# Altium PCB PCB1.PcbDoc
Units mm, origin at the board's own origin, x right, y up, seen from the top; angles counter-clockwise.
Board outline 63.37 x 59.94 mm, 2 copper layers (Top Layer, Bottom Layer); 46 components, 53 nets, 194 pads, 30 vias.
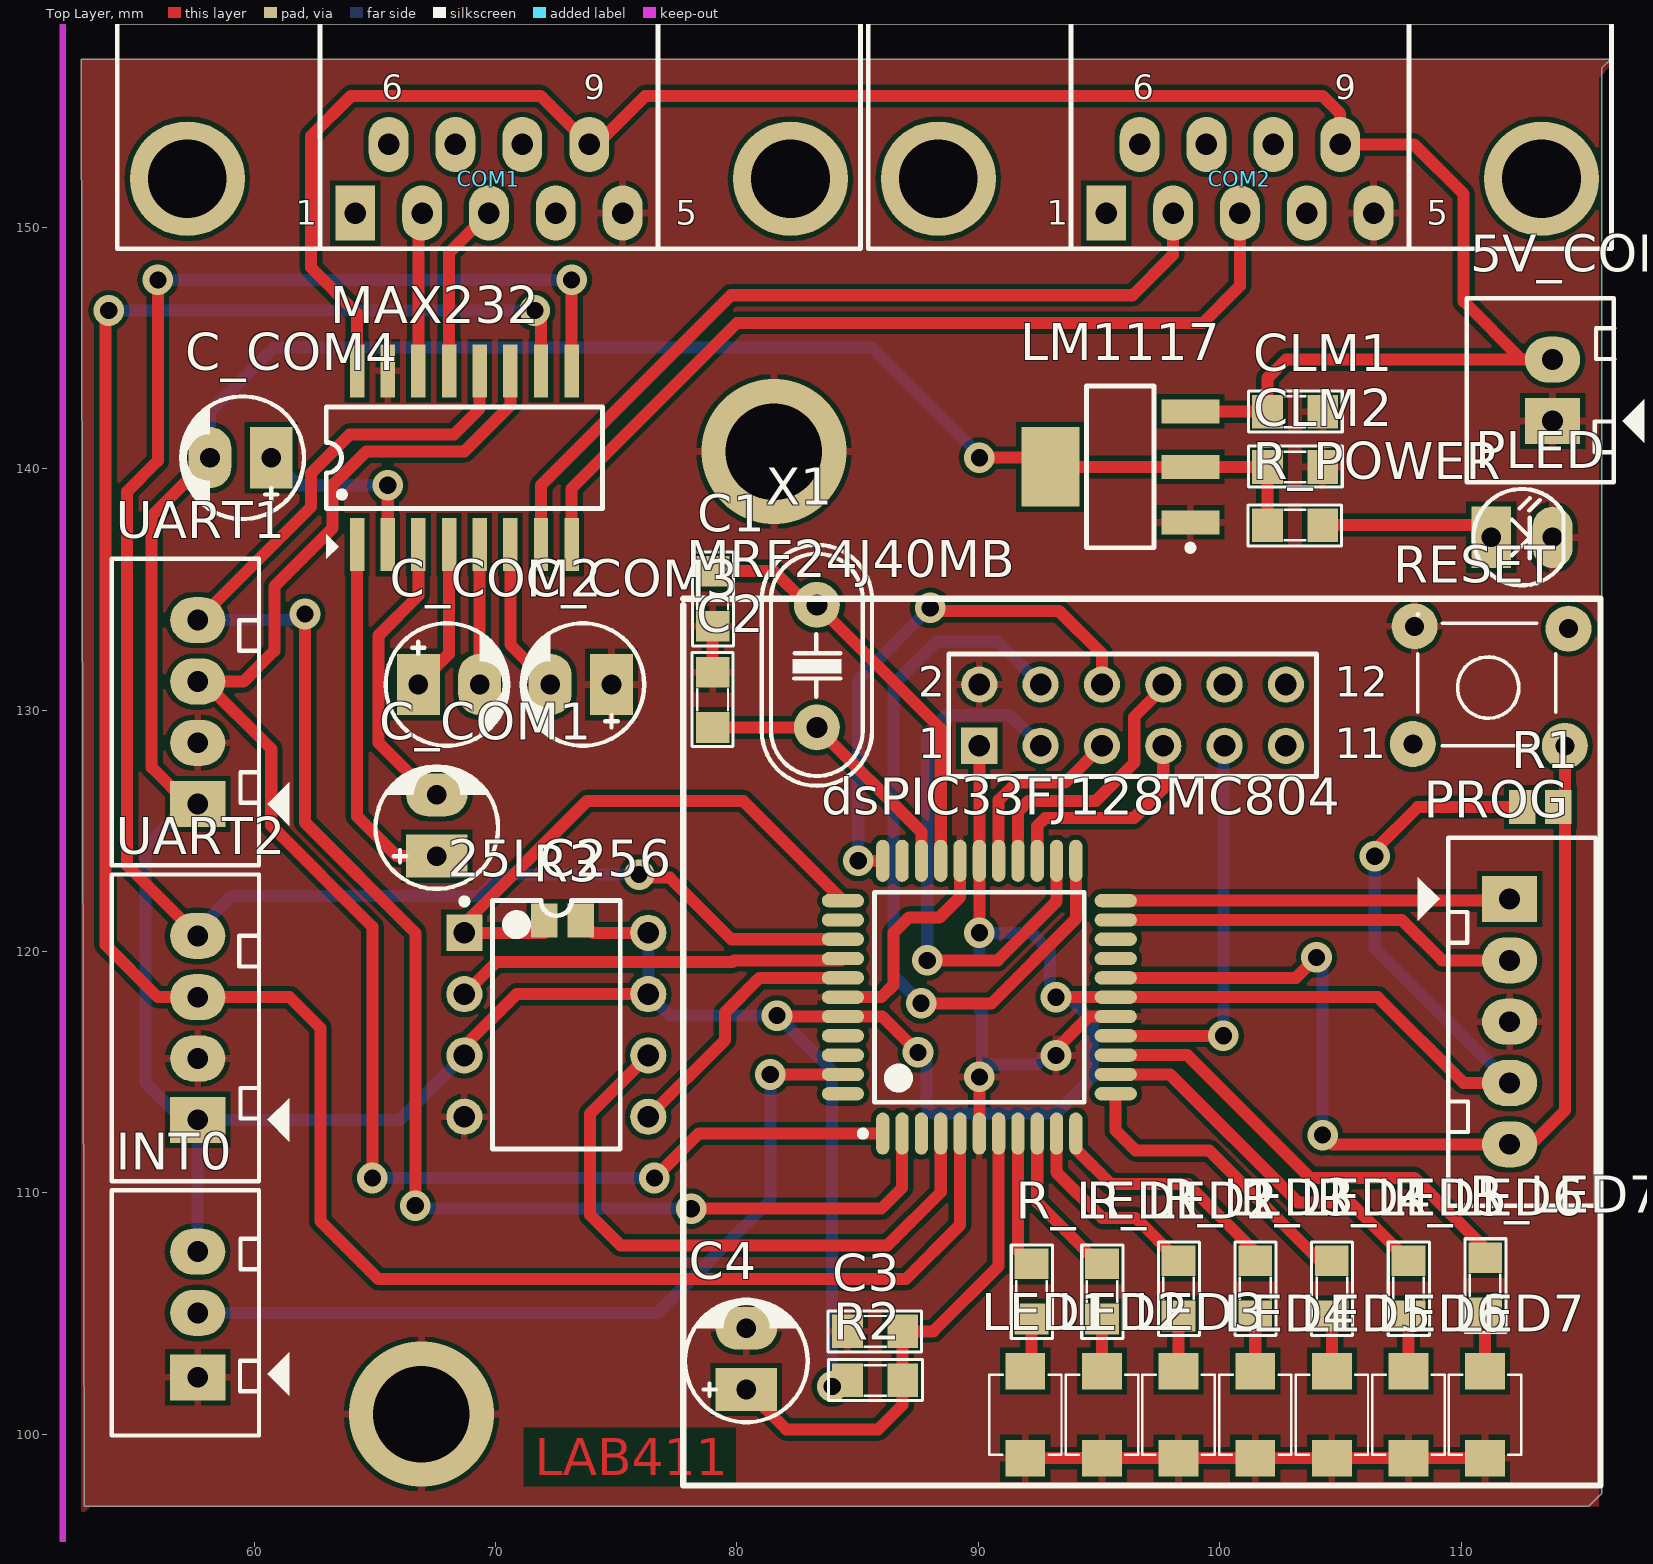
[diagram p0: Top Layer view]
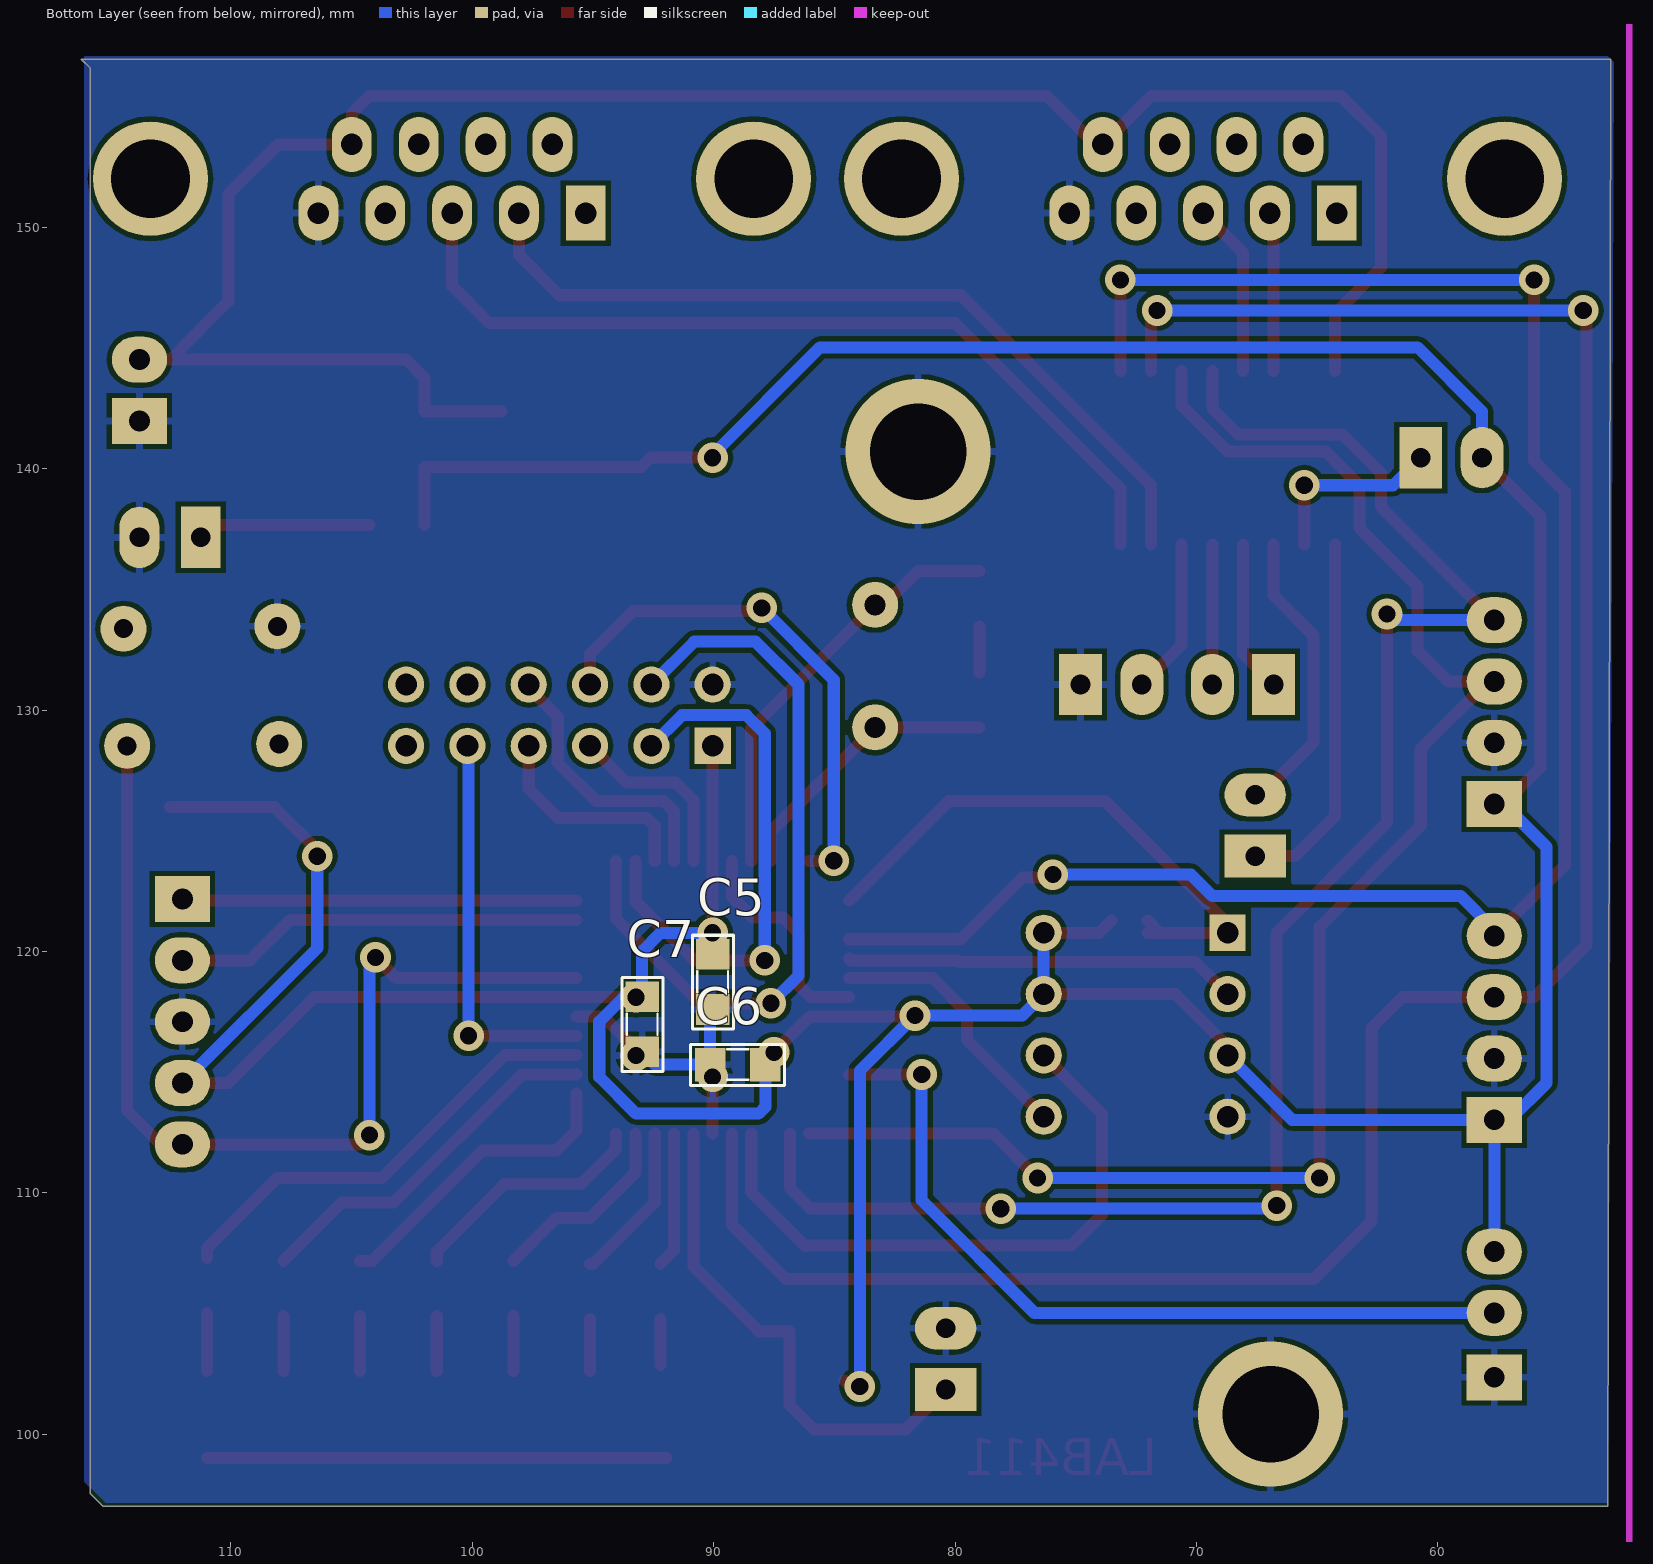
[diagram p1: Bottom Layer view, seen from below]
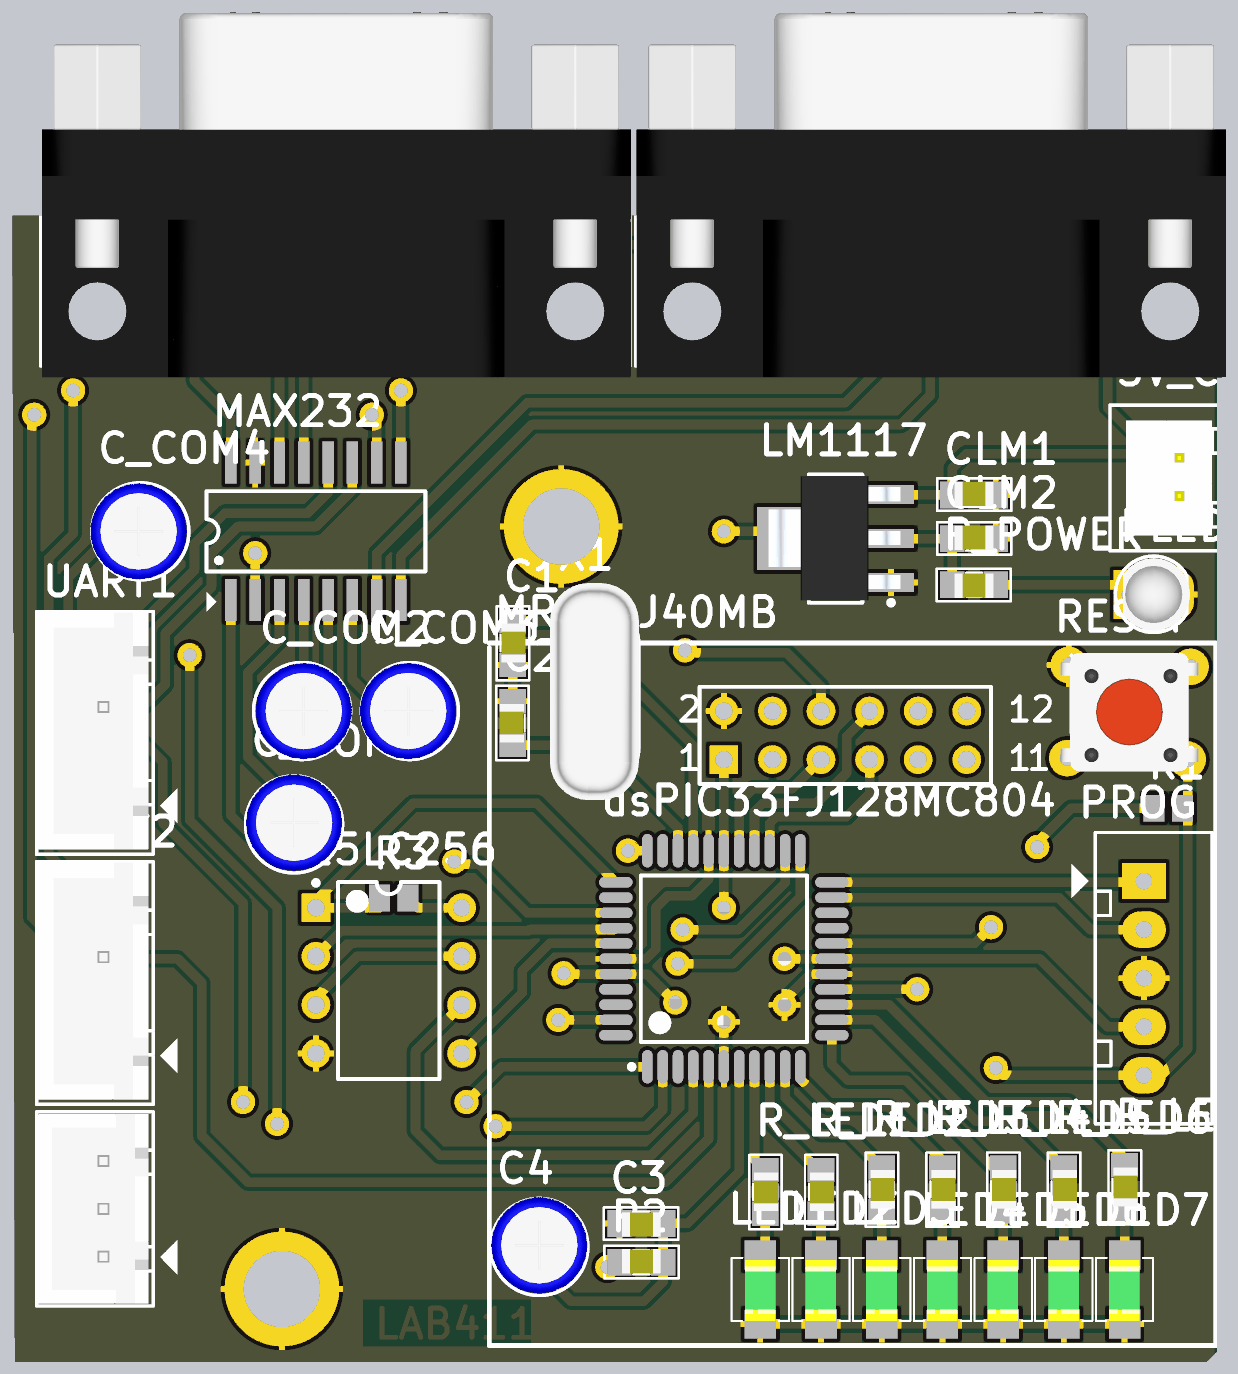
[diagram p2: 3D render of the assembled board from above, using the file's embedded part models]
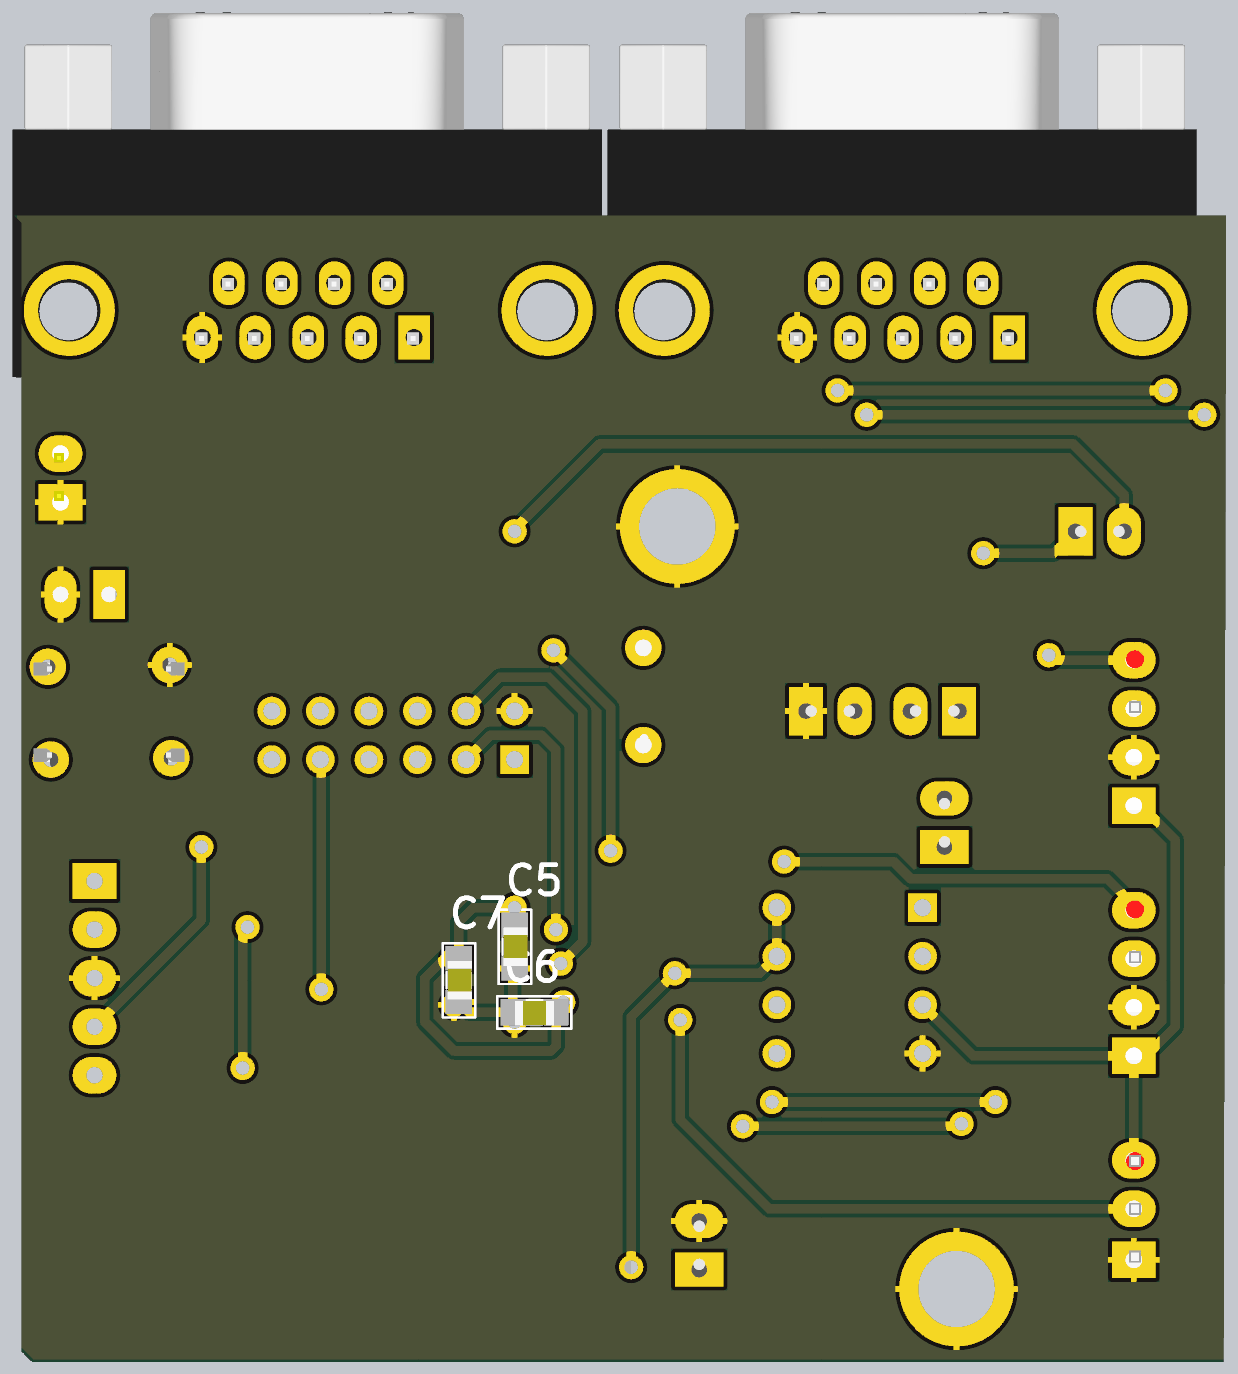
[diagram p3: 3D render of the assembled board from below, using the file's embedded part models]

## Layer stack, top to bottom
Top Layer: signal copper 0.0356
Dielectric: core 0.32, FR-4, Dk 4.8
Bottom Layer: signal copper 0.0356

## Board outline
52.832,156.972 116.205,156.972 115.824,156.591 115.824,97.536 115.316,97.028 52.959,97.028

## Design rules (kind name [scope] priority, off if disabled: settings)
Clearance [All] p1: gap=0.203
PlaneConnect [All] p1: planeconnectstyle=Relief reliefexpansion=0.508 reliefentries=4 reliefconductorwidth=0.5 reliefairgap=0.8
PolygonConnect [All] p1: connectstyle=Relief reliefconductorwidth=0.3 reliefentries=4 polygonreliefangle="90 Angle"
RoomDefinition Sheet1 [InComponentClass('Sheet1')] p1: confinementstyle=ConfineIn formatcopy=TRUE lockcomponents=FALSE outline 178.943,77.724 621.411,77.724 621.411,118.872 178.943,118.872
RoutingVias [All] p1: holewidth=0.635 width=1.016 viastyle="Through Hole" minholewidth=0.711 minwidth=1.27 maxholewidth=0.711 maxwidth=1.27
SilkscreenOverComponentPads [All] p1: minsilkscreentomaskgap=0.254
SolderMaskExpansion [All] p1: expansion=0.202
Width [All] p1: maxlimit=2 minlimit=0.203 preferedwidth=0.5
26 further rules are at their usual default settings.

## Components (designator, comment, footprint, x,y, rotation, side; value= is the part's Value field where it differs from the comment)
5V_CON "JP2" CON2 113.792,141.986 r90 top
25LC256 "25LC256" DIP-8 72.517,116.967 r0 top
C1 "103" SM-0805 78.994,134.62 r90 top
C2 "103" SM-0805 78.994,130.429 r270 top
C3 "104" SM-0805 85.725,104.267 r0 top
C4 "10uF" CP1/2 80.391,101.854 r90 top
C5 "104" SM-0805 90.043,118.745 r90 bottom
C6 "104" SM-0805 89.002,115.316 r180 bottom
C7 "104" SM-0805 92.964,116.992 r90 bottom
C_COM1 "1uF" CP1/2 67.564,123.952 r90 top
C_COM2 "1uF" CP1/2 66.802,131.064 r0 top
C_COM3 "1uF" CP1/2 74.803,131.064 r180 top
C_COM4 "1uF" CP1/2 60.706,140.462 r180 top
CLM1 "104" SM-0805 103.124,142.367 r180 top
CLM2 "104" SM-0805 103.124,140.081 r180 top
COM1 "COM 9 FMALE" "DSB 9-F" 69.723,152.019 r0 top
COM2 "COM 9 FMALE" "DSB 9-F" 100.838,152.019 r0 top
dsPIC33FJ128MC804 "DSPIC33FJ128MC804T-E/PT" TQFP-PT44_N 90.043,118.11 r90 top
INT0 "JP3" CON3 57.658,102.489 r90 top
LED1 "LED" SM-LED-Red 91.948,102.616 r270 top
LED2 "LED" SM-LED-Red 95.123,102.616 r270 top
LED3 "LED" SM-LED-Red 98.298,102.616 r270 top
LED4 "LED" SM-LED-Red 101.473,102.616 r270 top
LED5 "LED" SM-LED-Red 104.648,102.616 r270 top
LED6 "LED" SM-LED-Red 107.823,102.616 r270 top
LED7 "LED" SM-LED-Red 110.998,102.616 r270 top
LM1117 "LM1117" SOT223-4N 95.885,140.081 r180 top
MAX232 "MAX232" SOP16 68.707,140.462 r0 top
MRF24J40MB "Header 6X2" MRF24J40MB_board_mini 88.773,132.334 r270 top
PLED "LED" LED-3 111.252,137.16 r0 top
PROG "JP5" CON5 112.014,122.174 r270 top
R1 "10k" C0805 113.284,125.984 r0 top
R2 "1k" SM-0805 85.725,102.235 r180 top
R3 "Res Semi" C0805 72.771,121.285 r0 top
R_LED1 "1k" SM-0805 92.202,105.918 r90 top
R_LED2 "1k" SM-0805 95.123,105.918 r90 top
R_LED3 "1k" SM-0805 98.298,106.045 r90 top
R_LED4 "1k" SM-0805 101.473,106.045 r90 top
R_LED5 "1k" SM-0805 104.648,106.045 r90 top
R_LED6 "1k" SM-0805 107.823,106.045 r90 top
R_LED7 "1k" SM-0805 110.998,106.172 r90 top
R_POWER "1k" SM-0805 103.124,137.668 r0 top
RESET "SW" SW4 114.3,128.524 r180 top
UART1 "JP4" CON4 57.658,126.111 r90 top
UART2 "JP4" CON4 57.658,113.03 r90 top
X1 "4Mhz" XT2 83.312,131.826 r270 top

## Footprints (in the part's own frame and the unit in brackets; to place one, negate y for a bottom-side part, rotate by r counter-clockwise, add the part's x,y. Pads: shape width x height; smd on the part's side, far side on the other; paste and mask are expansions set on the pad)
C0805 [mm] "Chip Capacitor, Body 2.0x1.3mm, IPC High Density"
  rect 1.1x1.4 smd: 1(-0.75,0) 2(0.75,0)
  body extent -1.1,-0.72 1.1,0.72, height 1.4
CON2 [mil] "CON2"
  rect 75x90 hole 34: 1(0,0)
  oval 75x90 hole 34: 2(100,0)
  silkscreen extent -100,-150 200,140, body extent -68,-70 168,107, height 236
CON3 [mil] "CON 3"
  rect 75x90 hole 34: 1(-5,0)
  oval 75x90 hole 34: 2(100,0) 3(200,0)
  silkscreen extent -100,-150 300,140, body extent -95,-90 295,136, height 276
CON4 [mil] "CON4"
  rect 75x90 hole 34: 1(0,0)
  oval 75x90 hole 34: 2(100,0) 3(200,0) 4(300,0)
  silkscreen extent -100,-150 400,140, body extent -90,-90 398,136, height 276
CON5 [mil] "CON5"
  rect 75x90 hole 34: 1(0,0)
  oval 75x90 hole 34: 2(100,0) 3(200,0) 4(300,0) 5(400,0)
  silkscreen extent -100,-150 500,140
CP1/2 [mil] "Tu hoa < 22uF/16>50V"
  rect 70x100 hole 32: 1(0,0)
  oval 70x100 hole 32: 2(100,0)
  silkscreen extent -53,-100 146,100, body extent -49,-99 149,99, height 287
DIP-8 [mm] "DIP; 8 Leads; Row Spacing 7.62 mm; Pitch 2.54 mm"
  rect 1.5x1.5 hole 0.9: 1(-3.81,3.81)
  round 1.5 hole 0.9: 2(-3.81,1.27) 3(-3.81,-1.27) 4(-3.81,-3.81) 5(3.81,-3.81) 6(3.81,-1.27) 7(3.81,1.27) 8(3.81,3.81)
  silkscreen extent -3.93,-5.15 2.65,5.23, body extent -3.6,-5.15 3.6,5.15, height 5.08
"DSB 9-F" [mil] "COM FMALE - D Subminiature; 9 Position; Right Angle; Pitch 1.385 mm"
  rect 65x90 hole 35: 1(-218.11,-55.91)
  oval 65x90 hole 35: 2(-109.05,-55.91) 3(0,-55.91) 4(109.05,-55.91) 5(218.11,-55.91) 6(-163.58,55.91) 7(-54.53,55.91) 8(54.53,55.91) 9(163.58,55.91)
  round 187.4 hole 128.35: 10(-491.93,0) 11(491.93,0)
  silkscreen extent -606,-114 606,610, body extent -604,-138 608,613, height 495
LED-3 [mil] "LED 2 PIN, 3ly Only colour"
  rect 65x100 hole 32: 1(0,0)
  oval 65x100 hole 32: 2(100,0)
  silkscreen extent -29,-78 118,79, body extent -13,-75 125,75, height 217
MRF24J40MB_board_mini [mm]
  rect 1.5x1.5 hole 0.9: 1(3.81,1.27)
  round 1.5 hole 0.9: 2(1.27,1.27) 3(3.81,3.81) 4(1.27,3.81) 5(3.81,6.35) 6(1.27,6.35) 7(3.81,8.89) 8(1.27,8.89) 9(3.81,11.43) 10(1.27,11.43) 11(3.81,13.97) 12(1.27,13.97)
  silkscreen extent -2.29,-11 34.45,27, body extent 0,0 5.08,15.24, height 7
SM-0805 [mil] "Compoment SMD 80x50mil"
  rect 50x55 smd: 1(-45,0) 2(45,0)
  silkscreen extent -77,-34 76,33, body extent -40,-27 40,23, height 24
SM-LED-Red [mil]
  rect 60x65 smd: 1(0,0) 2(142,0)
  silkscreen extent 6,-59 136,59, body extent 10,-32 136,31, height 44
SOP16 [mm] "Small Outline; 16 Leads; Body Width 5.6 mm; Pitch 1.27 mm"
  rect 0.6x2.2 smd: 1(-4.445,-3.6) 2(-3.175,-3.6) 3(-1.905,-3.6) 4(-0.635,-3.6) 5(0.635,-3.6) 6(1.905,-3.6) 7(3.175,-3.6) 8(4.445,-3.6) 9(4.445,3.6) 10(3.175,3.6) 11(1.905,3.6) 12(0.635,3.6) 13(-0.635,3.6) 14(-1.905,3.6) 15(-3.175,3.6) 16(-4.445,3.6)
  silkscreen extent -5.73,-4.19 5.73,2.1
SOT223-4N [mm] "SOT223, 4-Leads, Body 6.5x3.5mm, Pitch 2.3mm, Lead Span 7mm, IPC Medium Density"
  rect 2.4x1 smd: 1(-2.9,2.3) 2(-2.9,0) 3(-2.9,-2.3)
  rect 2.4x3.3 smd: 4(2.9,0)
  silkscreen extent -3.03,-3.35 1.4,3.47, body extent -3.39,-3.27 3.5,3.23, height 1.72
SW4 [mil] "SW button 4pin, 250 x250 mil"
  round 75 hole 31: 1(0,0) 2(245,-195) 3(248,-3) 4(-6,-191)
  silkscreen extent 15,-215 240,0, body extent -36,-220 276,24, height 276
TQFP-PT44_N [mm] "Thin QFP, 44-Leads, Body 10x10mm, Pitch 0.8mm, IPC Medium Density"
  oval 1.75x0.55 smd: 1(-5.65,4) 2(-5.65,3.2) 3(-5.65,2.4) 4(-5.65,1.6) 5(-5.65,0.8) 6(-5.65,0) 7(-5.65,-0.8) 8(-5.65,-1.6) 9(-5.65,-2.4) 10(-5.65,-3.2) 11(-5.65,-4) 23(5.65,-4) 24(5.65,-3.2) 25(5.65,-2.4) 26(5.65,-1.6) 27(5.65,-0.8) 28(5.65,0) 29(5.65,0.8) 30(5.65,1.6) 31(5.65,2.4) 32(5.65,3.2) 33(5.65,4)
  oval 0.55x1.75 smd: 12(-4,-5.65) 13(-3.2,-5.65) 14(-2.4,-5.65) 15(-1.6,-5.65) 16(-0.8,-5.65) 17(0,-5.65) 18(0.8,-5.65) 19(1.6,-5.65) 20(2.4,-5.65) 21(3.2,-5.65) 22(4,-5.65) 34(4,5.65) 35(3.2,5.65) 36(2.4,5.65) 37(1.6,5.65) 38(0.8,5.65) 39(0,5.65) 40(-0.8,5.65) 41(-1.6,5.65) 42(-2.4,5.65) 43(-3.2,5.65) 44(-4,5.65)
  silkscreen extent -5.77,-4.35 4.35,4.95, body extent -5,-5 5,5, height 1.2
XT2 [mil] "Footpin for Crystal 2 pin"
  round 75 hole 34: 1(-100,0) 2(100,0)
  silkscreen extent -198,-90 195,90, body extent -233,-93 213,90, height 138

## Part data
5V_CON: library part Con2, "Connector 2"
C1 C2 C3 C5 C6 C7: library part CM, "Cap SMD"
C4 C_COM1 C_COM2 C_COM3 C_COM4: library part CP1, "Cap P  0,1uF < 22uF , 16 - 50V"
CLM1 CLM2: library part CN2, "Cap np 104 => 105pF"
COM1 COM2: library part DSB9F, "COM 9"
dsPIC33FJ128MC804: "High-Performance 16-bit Digital Signal Controller, 128 KB Flash, 16 KB RAM, 44-Pin TQFP, Extended High Temperature, Tape and Reel"
INT0: library part Con3, "Connector 3"
LED1 LED2 LED3 LED4 LED5 LED6 LED7 PLED: "LED Single colour Green and Red"
LM1117: "3v3"
MAX232: "Dual EIA-232 Driver/Receiver"
MRF24J40MB: "Header, 6-Pin, Dual row"
PROG: library part Con5, "Connector 5"
R1 R2 R_LED1 R_LED2 R_LED3 R_LED4 R_LED5 R_LED6 R_LED7 R_POWER: library part R, "Resistor 1/4W"
R3: "Semiconductor Resistor"
RESET: library part SW4, "Switch button 4 pin"
UART1 UART2: library part Con4, "Connector 4"
X1: library part XT2, "Crystal For all Crystal 2pin."

## Via types
v1: diameter 1.27, hole 0.711, Top Layer to Bottom Layer, 28 vias
v2: diameter 6, hole 4, Top Layer to Bottom Layer, 2 vias

## Nets (pads, with @x,y where several pads share a name; then routed paths per layer and width w, separated by ;. In a path a pad name is that pad's centre, name@x,y a point inside that pad or via, vN(x,y) a via of type N, cw(c..) or ccw(c..) an arc to the next point about the centre after c; other vN are vias at no path point)
5V: 5V_CON.2 CLM1.2 COM1.9 COM2.9 LM1117.3 MAX232.16 | length 87.6
  Top Layer w0.5: MAX232.16 64.262,146.431 62.357,148.336 62.357,153.797 64.008,155.448 71.869,155.448 COM1.9 74.191,153.439 76.2,155.448 104.267,155.448 104.993,154.722 COM2.9 108.054,153.439 110.109,151.384 110.109,146.939 112.522,144.526 ; LM1117.3 98.799,142.367 CLM1.2 101.981,143.764 102.743,144.526 112.522,144.526 ; 5V_CON.2 112.522,144.526
AN0: dsPIC33FJ128MC804.19
AN1: dsPIC33FJ128MC804.20
CS1: dsPIC33FJ128MC804.33 MRF24J40MB.6 | length 21.9
  Top Layer w0.5: v1(85.025,123.76) dsPIC33FJ128MC804.33 ; v1(88.011,134.239) 88.138,134.112 93.345,134.112 95.123,132.334 MRF24J40MB.6
  Bottom Layer w0.5: v1(85.025,123.76) 85.025,131.253 v1(88.011,134.239)
CS2: 25LC256.1 dsPIC33FJ128MC804.34 R3.1 | length 26.7
  Top Layer w0.5: R3.1@72.021,120.777 R3.1@71.513,120.777 ; R3.1 R3.1@71.513,120.777 ; dsPIC33FJ128MC804.34 80.265,126.238 73.787,126.238 68.707,121.158 25LC256.1 ; 25LC256.1 R3.1@71.513,120.777 ; 25LC256.1 R3.1@71.513,120.777
GND: 5V_CON.1 25LC256.4 C1.1 C2.1 C3.1 C4.2 C5.1 C6.1 C7.1 C_COM3.1 CLM1.1 CLM2.1 COM1.5 COM2.5 dsPIC33FJ128MC804.6 dsPIC33FJ128MC804.16 dsPIC33FJ128MC804.29 dsPIC33FJ128MC804.39 INT0.1 LED1.2 LED2.2 LED3.2 LED4.2 LED5.2 LED6.2 LED7.2 LM1117.1 MAX232.15 MRF24J40MB.2 PLED.2 PROG.3 RESET.2 UART1.2 UART2.2 | length 41.3
  Top Layer w0.5: C2.1 C1.1 ; dsPIC33FJ128MC804.39 85.979,118.11 86.487,118.618 86.487,120.777 87.122,121.412 88.392,121.412 89.243,122.263 dsPIC33FJ128MC804.29 ; dsPIC33FJ128MC804.6 v1(90.043,114.808) ; LED1.2 LED2.2 LED3.2 LED4.2 LED5.2 LED6.2 LED7.2 ; v1(93.218,115.697) 93.218,115.951 94.577,117.31 dsPIC33FJ128MC804.16
  Bottom Layer w0.5: C5.1 90.145,117.5 C6.1 92.431,115.316 C7.1
  other v2: 66.929,100.838 81.534,140.716
INT0: dsPIC33FJ128MC804.43 INT0.2 | length 33.9
  Top Layer w0.5: v1(81.382,114.91) dsPIC33FJ128MC804.43
  Bottom Layer w0.5: INT0.2 76.708,105.029 81.382,109.703 v1(81.382,114.91)
INT1: dsPIC33FJ128MC804.27 MRF24J40MB.5 | length 7.7
  Top Layer w0.5: dsPIC33FJ128MC804.27 90.843,126.276 91.567,127 93.599,127 MRF24J40MB.5
LED1: dsPIC33FJ128MC804.8 R_LED1.2 | length 5.6
  Top Layer w0.5: dsPIC33FJ128MC804.8 91.643,107.62 R_LED1.2
LED2: dsPIC33FJ128MC804.9 R_LED2.2 | length 6.6
  Top Layer w0.5: dsPIC33FJ128MC804.9 92.443,109.614 94.996,107.061 R_LED2.2
LED3: dsPIC33FJ128MC804.10 R_LED3.2 | length 8.2
  Top Layer w0.5: dsPIC33FJ128MC804.10 93.243,110.846 95.123,108.966 96.52,108.966 R_LED3.2
LED4: dsPIC33FJ128MC804.11 R_LED4.2 | length 10.2
  Top Layer w0.5: dsPIC33FJ128MC804.11 94.043,111.824 95.504,110.363 98.679,110.363 101.473,107.569 R_LED4.2
LED5: dsPIC33FJ128MC804.12 R_LED5.2 | length 12.7
  Top Layer w0.5: dsPIC33FJ128MC804.12 95.693,112.587 96.52,111.76 99.568,111.76 104.14,107.188 R_LED5.2
LED6: dsPIC33FJ128MC804.13 R_LED6.2 | length 15.3
  Top Layer w0.5: dsPIC33FJ128MC804.13 97.942,114.91 103.251,109.601 105.41,109.601 R_LED6.2
LED7: dsPIC33FJ128MC804.14 R_LED7.2 | length 19
  Top Layer w0.5: dsPIC33FJ128MC804.14 98.666,115.71 103.759,110.617 108.077,110.617 110.998,107.696 R_LED7.2
NetC_COM1_1: C_COM1.1 MAX232.1 | length 15.2
  Top Layer w0.5: MAX232.1 64.262,125.603 65.913,123.952 C_COM1.1
NetC_COM1_2: C_COM1.2 MAX232.3 | length 12.2
  Top Layer w0.5: MAX232.3 66.802,134.747 65.151,133.096 65.151,128.651 67.31,126.492 C_COM1.2
NetC_COM2_1: C_COM2.1 MAX232.4 | length 6.3
  Top Layer w0.5: C_COM2.1 68.072,132.334 MAX232.4
NetC_COM2_2: C_COM2.2 MAX232.5 | length 5.8
  Top Layer w0.5: C_COM2.2 MAX232.5
NetC_COM3_2: C_COM3.2 MAX232.6 | length 6.5
  Top Layer w0.5: MAX232.6 70.612,132.715 C_COM3.2
NetC_COM4_1: C_COM4.1 MAX232.2 | length 7.8
  Top Layer w0.5: MAX232.2 v1(65.532,139.319)
  Bottom Layer w0.5: C_COM4.1 61.849,139.319 v1(65.532,139.319)
NetLED1_1: LED1.1 R_LED1.1 | length 1.9
  Top Layer w0.5: LED1.1@92.202,102.87 R_LED1.1
NetLED2_1: LED2.1 R_LED2.1 | length 2.2
  Top Layer w0.5: LED2.1 R_LED2.1
NetLED3_1: LED3.1 R_LED3.1 | length 2.3
  Top Layer w0.5: LED3.1 R_LED3.1
NetLED4_1: LED4.1 R_LED4.1 | length 2.3
  Top Layer w0.5: LED4.1 R_LED4.1
NetLED5_1: LED5.1 R_LED5.1 | length 2.3
  Top Layer w0.5: LED5.1 R_LED5.1
NetLED6_1: LED6.1 R_LED6.1 | length 2.3
  Top Layer w0.5: LED6.1 R_LED6.1
NetLED7_1: LED7.1 R_LED7.1 | length 2.4
  Top Layer w0.5: LED7.1 R_LED7.1
NetPLED_1: PLED.1 R_POWER.2 | length 7.2
  Top Layer w0.5: R_POWER.2 110.744,137.668 PLED.1
OSC1: C1.2 dsPIC33FJ128MC804.30 X1.1 | length 17.6
  Top Layer w0.5: C1.2 81.534,135.763 82.931,134.366 X1.1 88.443,129.235 dsPIC33FJ128MC804.30
OSC2: C2.2 dsPIC33FJ128MC804.31 X1.2 | length 11.6
  Top Layer w0.5: C2.2 X1.2 87.643,124.955 dsPIC33FJ128MC804.31
PGC: dsPIC33FJ128MC804.22 PROG.1 | length 16.3
  Top Layer w0.5: dsPIC33FJ128MC804.22 PROG.1@111.95,122.11
PGD: dsPIC33FJ128MC804.21 PROG.2 | length 17
  Top Layer w0.5: dsPIC33FJ128MC804.21 107.544,121.31 109.22,119.634 PROG.2
R1IN: COM1.3 MAX232.13 | length 7.2
  Top Layer w0.5: MAX232.13 68.072,148.948 COM1.3
R1OUT: dsPIC33FJ128MC804.2 MAX232.12 UART1.4 | length 71.5
  Top Layer w0.5: UART1.4 62.357,138.43 62.357,139.827 63.949,141.419 68.267,141.419 69.342,142.494 MAX232.12 ; v1(62.103,133.985) 62.103,125.349 66.675,120.777 v1(66.675,109.474) ; v1(78.105,109.347) 85.979,109.347 86.843,110.211 dsPIC33FJ128MC804.2
  Bottom Layer w0.5: UART1.4 61.849,133.731 v1(62.103,133.985) ; v1(66.675,109.474) 66.802,109.347 v1(78.105,109.347)
R2IN: COM2.3 MAX232.8 | length 36.5
  Top Layer w0.5: MAX232.8 73.152,139.192 80.01,146.05 99.314,146.05 100.838,147.574 COM2.3
R2OUT: dsPIC33FJ128MC804.36 MAX232.9 UART2.4 | length 78.9
  Top Layer w0.5: v1(56.007,147.828) 56.007,140.335 54.737,139.065 54.737,123.571 UART2.4 ; MAX232.9 v1(73.152,147.828) ; v1(75.946,123.19) 75.946,123.063 77.216,123.063 79.769,120.51 dsPIC33FJ128MC804.36
  Bottom Layer w0.5: v1(56.007,147.828) v1(73.152,147.828) ; UART2.4 57.658,120.904 59.055,122.301 69.342,122.301 70.231,123.19 v1(75.946,123.19)
RP2_WAKE: dsPIC33FJ128MC804.23 MRF24J40MB.4 | length 31.5
  Top Layer w0.5: v1(87.63,117.856) 90.551,117.856 94.043,121.348 dsPIC33FJ128MC804.23
  Bottom Layer w0.5: v1(87.63,117.856) 86.487,118.999 86.487,131.064 88.265,132.842 90.805,132.842 MRF24J40MB.4
RP3_RSTMRF: dsPIC33FJ128MC804.24 MRF24J40MB.3 | length 23
  Top Layer w0.5: v1(87.884,119.634) 90.805,119.634 93.243,122.072 dsPIC33FJ128MC804.24
  Bottom Layer w0.5: v1(87.884,119.634) 87.884,129.032 88.646,129.794 91.313,129.794 MRF24J40MB.3
RP23: dsPIC33FJ128MC804.3
SCK1: dsPIC33FJ128MC804.15 MRF24J40MB.9 | length 16.5
  Top Layer w0.5: dsPIC33FJ128MC804.15 v1(100.152,116.51)
  Bottom Layer w0.5: v1(100.152,116.51) 100.152,128.473 MRF24J40MB.9
SCK2: 25LC256.6 dsPIC33FJ128MC804.4 | length 26
  Top Layer w0.5: 25LC256.6 73.914,113.284 73.914,109.093 75.184,107.823 86.233,107.823 88.443,110.033 dsPIC33FJ128MC804.4
SDI1: dsPIC33FJ128MC804.26 MRF24J40MB.8 | length 11.4
  Top Layer w0.5: dsPIC33FJ128MC804.26 91.643,125.806 92.075,126.238 94.869,126.238 96.46,127.829 96.46,129.727 97.663,130.93 MRF24J40MB.8
SDI2: 25LC256.2 dsPIC33FJ128MC804.37 | length 16.3
  Top Layer w0.5: 25LC256.2 70.044,119.574 79.823,119.574 79.887,119.638 84.321,119.638 dsPIC33FJ128MC804.37
SDO1: dsPIC33FJ128MC804.25 MRF24J40MB.7 | length 9.1
  Top Layer w0.5: dsPIC33FJ128MC804.25 92.443,125.209 92.769,125.535 96.452,125.535 97.663,126.746 MRF24J40MB.7
SDO2: 25LC256.5 dsPIC33FJ128MC804.38 | length 11.1
  Top Layer w0.5: 25LC256.5 79.502,116.332 79.502,117.475 80.937,118.91 dsPIC33FJ128MC804.38
T1IN: dsPIC33FJ128MC804.1 MAX232.11 UART1.3 | length 67.1
  Top Layer w0.5: UART1.3 UART1.3@57.912,131.191 ; v1(64.897,110.617) 64.897,121.031 60.706,125.222 60.706,128.397 UART1.3@57.912,131.191 ; MAX232.11 70.612,142.621 68.707,140.716 64.643,140.716 63.246,139.319 63.246,137.541 60.833,135.128 60.833,132.461 59.563,131.191 UART1.3@57.912,131.191 ; v1(76.581,110.617) 78.424,112.46 dsPIC33FJ128MC804.1
  Bottom Layer w0.5: v1(64.897,110.617) v1(76.581,110.617)
T1OUT: COM1.2 MAX232.14 | length 6.6
  Top Layer w0.5: MAX232.14 66.802,150.448 COM1.2
T2IN: dsPIC33FJ128MC804.5 MAX232.10 UART2.3 | length 97.1
  Top Layer w0.5: v1(53.975,146.558) 53.839,146.422 53.839,120.278 56.007,118.11 UART2.3 61.468,118.11 62.738,116.84 62.738,108.839 65.151,106.426 86.995,106.426 89.243,108.674 dsPIC33FJ128MC804.5 ; v1(71.628,146.558) 71.882,146.304 MAX232.10
  Bottom Layer w0.5: v1(53.975,146.558) v1(71.628,146.558)
T2OUT: COM2.2 MAX232.7 | length 34.3
  Top Layer w0.5: MAX232.7 71.882,139.319 79.756,147.193 96.393,147.193 98.068,148.868 COM2.2
VCAP: C3.2 C4.1 dsPIC33FJ128MC804.7 R2.1 | length 21.2
  Top Layer w0.5: C4.1 82.042,100.203 85.852,100.203 86.868,101.219 R2.1 C3.2 88.138,104.267 90.843,106.972 dsPIC33FJ128MC804.7
VCC: 25LC256.3 25LC256.7 25LC256.8 C5.2 C6.2 C7.2 C_COM4.2 CLM2.2 dsPIC33FJ128MC804.17 dsPIC33FJ128MC804.28 dsPIC33FJ128MC804.40 INT0.3 LM1117.2 LM1117.4 MRF24J40MB.1 PROG.4 R1.1 R2.2 R3.2 R_POWER.1 UART1.1 UART2.1 | length 211.9
  Top Layer w0.5: UART1.1 57.277,126.111 55.753,127.635 55.753,138.049 C_COM4.2 ; 25LC256.3 68.707,116.078 70.866,118.237 25LC256.7 ; R3.2 74.029,120.777 25LC256.8 ; v1(81.661,117.348) 81.699,117.31 dsPIC33FJ128MC804.40 86.017,117.31 v1(87.503,115.824) ; v1(83.947,101.981) 84.328,101.981 R2.2 ; v1(90.043,120.777) dsPIC33FJ128MC804.28 MRF24J40MB.1 ; v1(90.043,140.462) 92.604,140.462 LM1117.4 LM1117.2 CLM2.2 R_POWER.1 ; v1(93.218,118.11) dsPIC33FJ128MC804.17 106.553,118.11 110.109,114.554 PROG.4 ; v1(106.426,123.952) 106.426,124.206 108.204,125.984 R1.1
  Bottom Layer w0.5: UART2.1@56.896,113.03 UART2.1@57.023,113.03 ; INT0.3 UART2.1 ; UART1.1 57.277,126.111 55.499,124.333 55.499,114.554 UART2.1@57.023,113.03 ; C_COM4.2 58.166,142.367 60.833,145.034 85.598,145.034 90.043,140.589 v1(90.043,140.462) ; 25LC256.3 66.04,113.03 UART2.1 ; 25LC256.8 25LC256.7 77.216,117.348 v1(81.661,117.348) 83.947,115.062 v1(83.947,101.981) ; C6.2@87.503,115.672 v1(87.503,115.824) 87.859,115.468 C6.2 87.859,113.563 88.138,113.284 93.218,113.284 94.742,114.808 94.742,117.094 93.726,118.11 v1(93.218,118.11) ; C5.2 v1(90.043,120.777) 92.202,120.777 92.964,120.015 C7.2 ; v1(106.426,123.952) 106.426,120.142 PROG.4 ; UART2.1@57.023,113.03 UART2.1
VPP: dsPIC33FJ128MC804.18 PROG.5 R1.2 RESET.1 | length 42
  Top Layer w0.5: dsPIC33FJ128MC804.18 103.162,118.91 v1(104.013,119.761) ; v1(104.267,112.395) 104.648,112.014 PROG.5 112.903,112.014 114.3,113.411 RESET.1
  Bottom Layer w0.5: v1(104.013,119.761) 104.267,119.507 v1(104.267,112.395)
pads on no net: COM1.1 COM1.4 COM1.6 COM1.7 COM1.8 COM1.10 COM1.11 COM2.1 COM2.4 COM2.6 COM2.7 COM2.8 COM2.10 COM2.11 dsPIC33FJ128MC804.32 dsPIC33FJ128MC804.35 dsPIC33FJ128MC804.41 dsPIC33FJ128MC804.42 dsPIC33FJ128MC804.44 MRF24J40MB.10 MRF24J40MB.11 MRF24J40MB.12 RESET.3 RESET.4
copper on no net: | length 105.7
  Bottom Layer w0.254: 52.706,93.98 52.704,94.488 ; 54.228,94.745 52.705,94.234 ; 54.23,93.729 52.705,94.234 ; 76.304,94.281 52.705,94.234 ; 92.352,94.314 115.951,94.361 ; 114.426,94.866 115.951,94.361 ; 114.428,93.85 115.951,94.361 ; 115.952,94.107 115.95,94.615 ; 122.701,155.061 123.19,156.591 ; 122.936,156.588 123.444,156.594 ; 123.425,98.418 123.952,96.901 ; 123.469,134.769 123.19,156.591 ; 123.673,118.723 123.952,96.901 ; 123.698,96.898 124.206,96.904 ; 123.717,155.074 123.19,156.591 ; 124.441,98.431 123.952,96.901

## Polygon pours and split planes (outlines as drawn)
GND on Top Layer "Top Layer-No Net" (solid, pour order 2): 52.832,156.972 115.951,156.972 116.205,156.718 115.697,156.21 115.697,97.028 53.213,97.028 52.832,96.647
GND on Bottom Layer "Top Layer-No Net" (solid, pour order 6): 52.705,156.845 52.959,157.099 116.078,157.099 116.078,98.044 115.57,97.536 115.189,97.155 52.959,97.155

## Keep-outs
Keep-Out Layer:
  lines w0.254: 52.07,77.47 176.53,77.47 176.53,176.53 52.07,176.53 52.07,77.47

## Other copper
Top Layer:
  text "LAB411" at 71.628,98.298 h1.52
Bottom Layer:
  text "59.695 (mm)" at 122.558,134.504 h1.52 r270.73
  text "63.246 (mm)" at 76.56,93.368 h1.52 r0.12

## Silkscreen, mask and mechanical layers (free items; w line width, h text height)
Drill Drawing:
  text ".LEGEND" at 182.88,81.28 h1.52
  text "Drill Drawing." at 182.88,78.74 h1.52

## Dimensions
52.07,77.47 to 176.53,77.47 on Mechanical 1
52.07,77.47 to 52.07,176.53 on Mechanical 1

## Text inside footprints (layer, text, board x,y; h text height)
COM1: Top Overlay "1" at 61.722,150.114 h1.02; Top Overlay "5" at 77.47,150.114 h1.02; Top Overlay "9" at 73.66,155.321 h1.02; Top Overlay "6" at 65.278,155.321 h1.02; Top Overlay "FMALE" at 65.913,159.258 h1.52
COM2: Top Overlay "1" at 92.837,150.114 h1.02; Top Overlay "5" at 108.585,150.114 h1.02; Top Overlay "9" at 104.775,155.321 h1.02; Top Overlay "6" at 96.393,155.321 h1.02; Top Overlay "FMALE" at 97.028,159.258 h1.52
MRF24J40MB: Top Overlay "12" at 104.775,130.556 h1.27; Top Overlay "1" at 105.791,128.016 h1.27; Top Overlay "1" at 104.775,128.016 h1.27; Top Overlay "1" at 87.503,128.016 h1.27; Top Overlay "2" at 87.503,130.556 h1.27